# Altium PCB FCM_Integrated.PcbDoc (part 2 of 2)
Units mil, origin at the board's own origin, x right, y up, seen from the top; angles counter-clockwise.
Board outline 5855 x 4354 mil, 4 copper layers (Top Layer, Power, Ground, Bottom Layer), stack 23.756 mil thick; 164 components, 92 nets, 624 pads, 88 vias.
Unrouted connection lines stored in the file: 103.
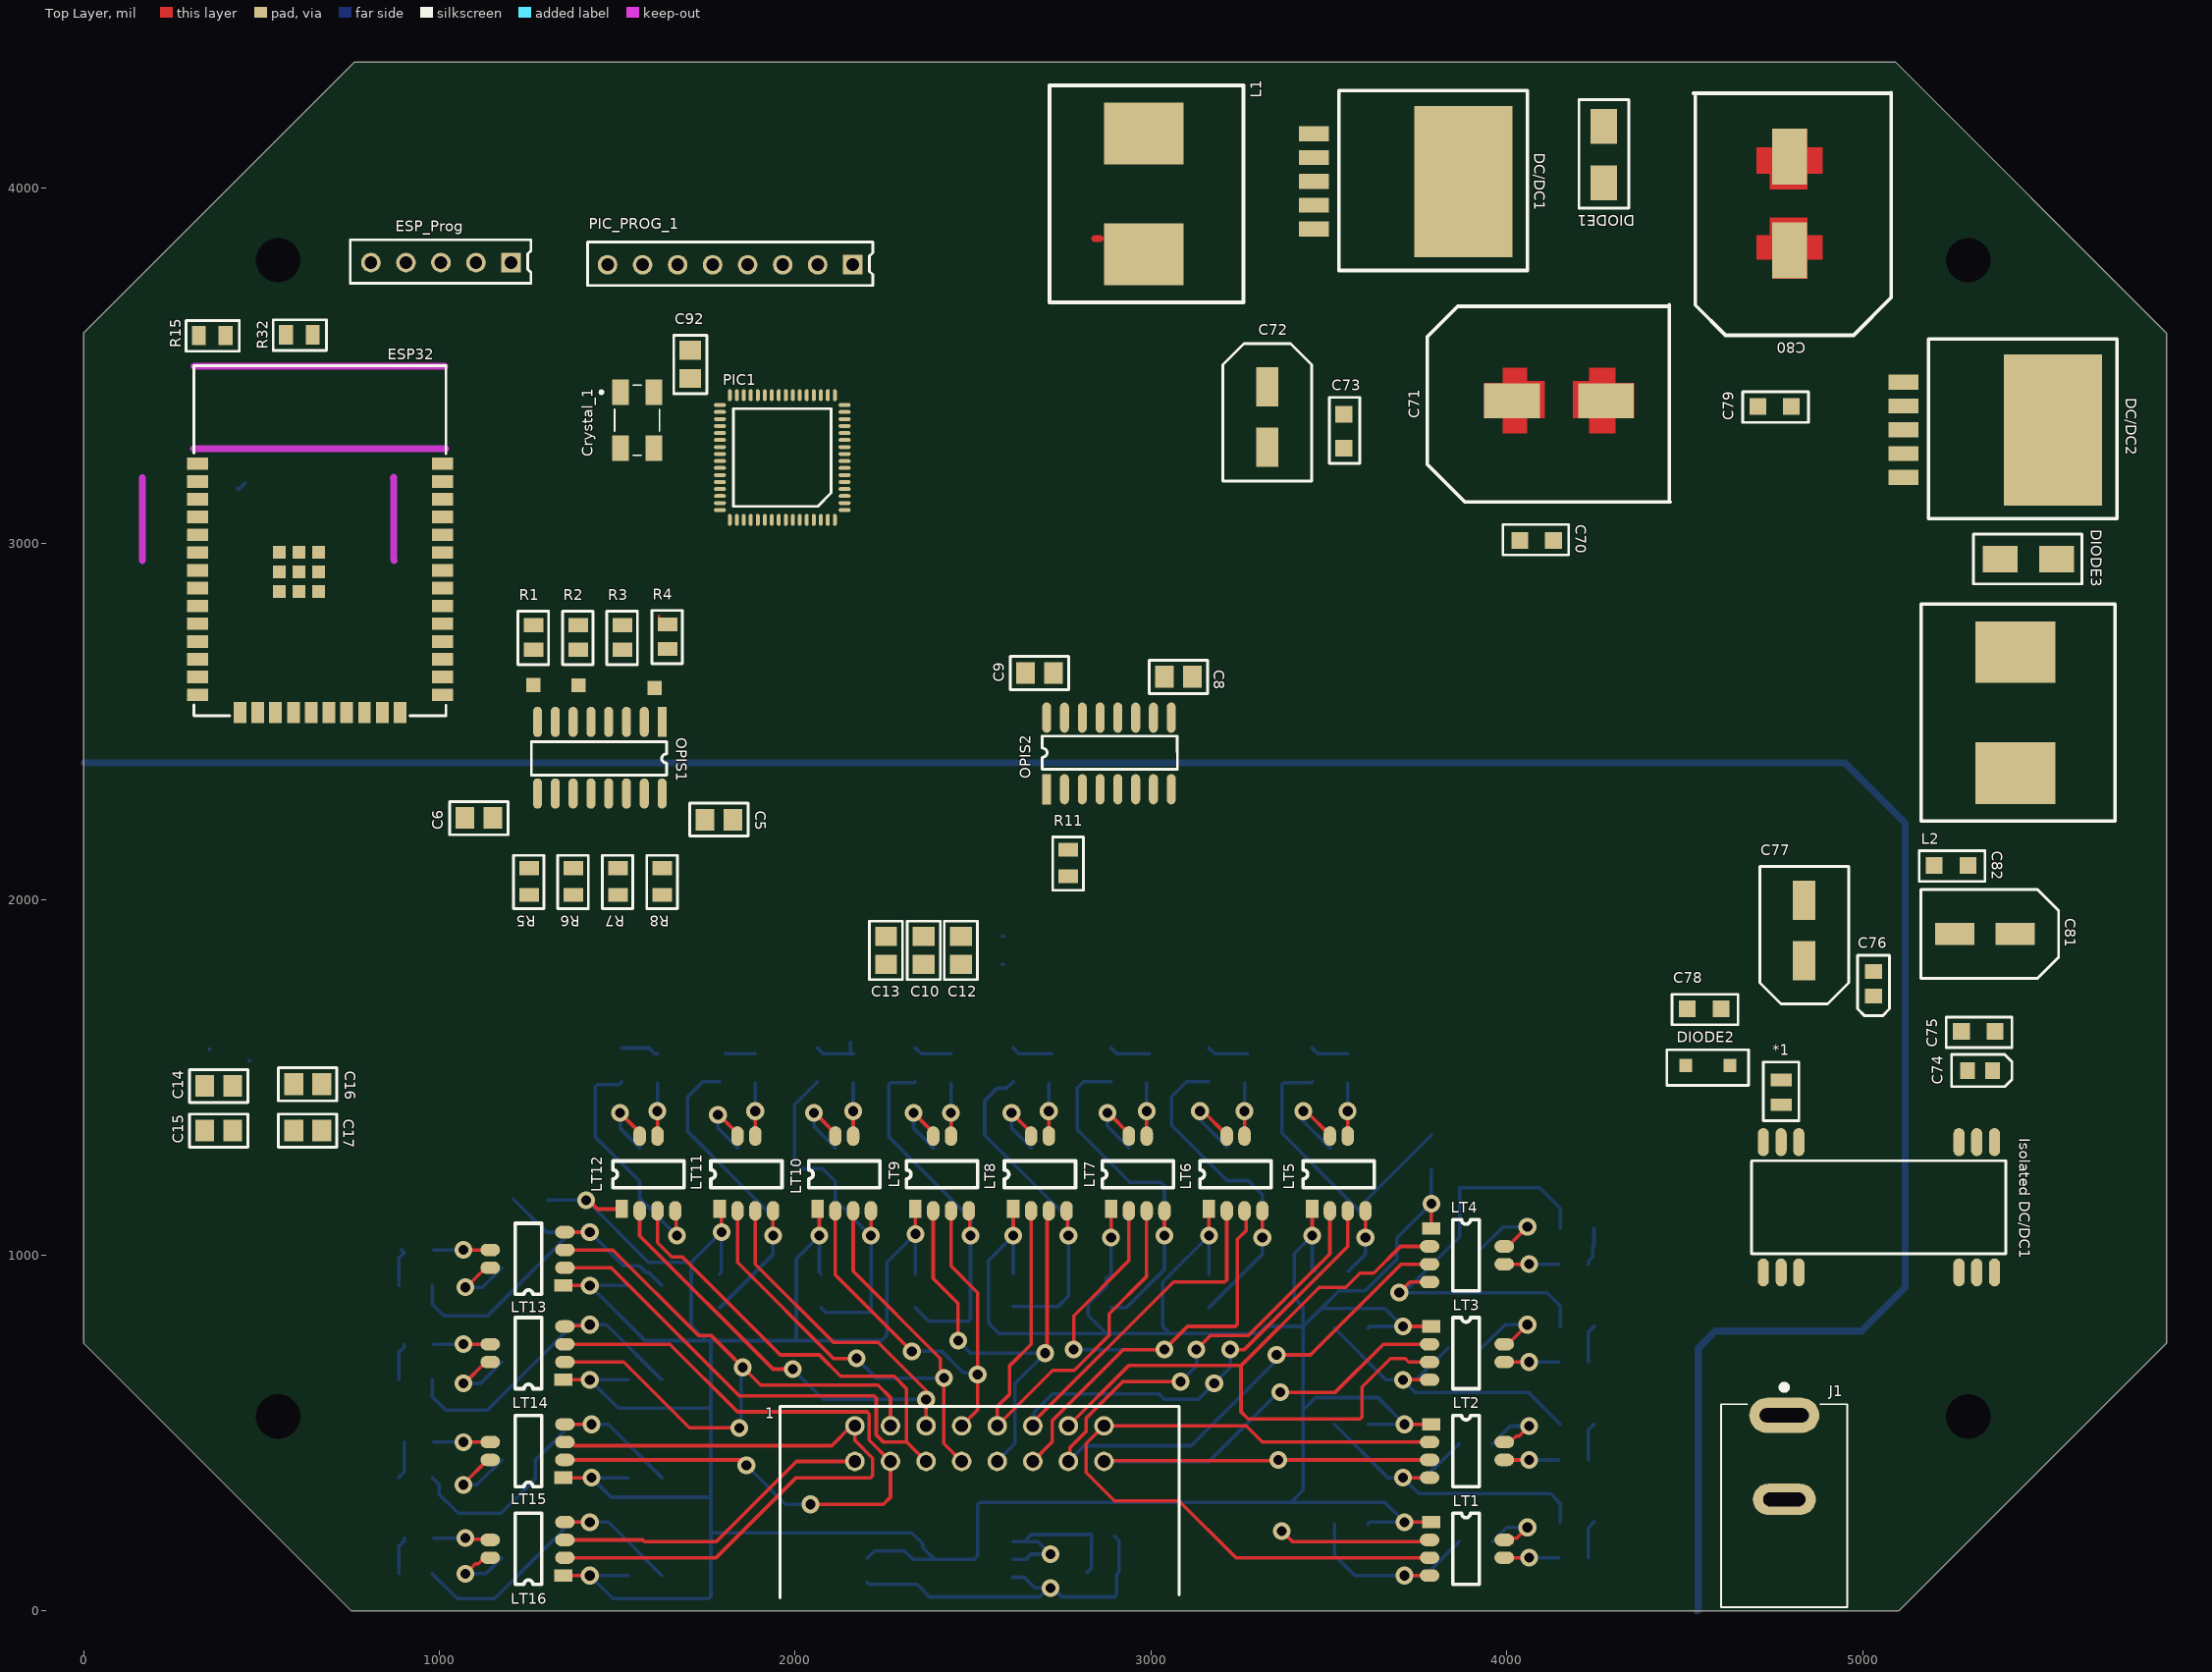
[diagram p0: Top Layer view]

## Part data (continued)
U1: "Precision Micropower, Low Dropout Voltage Reference, 2.048 V Output, 2.3 to 15 V Supply, Industrial, 8-pin SOIC (R-8), Reel", Manufacturer="Analog Devices", Operating Temp Range="-40 to 85 degC", Code_JEDEC=MS-012-AA, ComponentLink1Description="Manufacturer URL", ComponentLink1URL=http://www.analog.com/en/index.html, ComponentLink2Description=Datasheet, ComponentLink2URL=http://www.analog.com/static/imported-files/data_sheets/REF19xSeries.pdf, ComponentLink3Description="Package Specification", ComponentLink3URL=http://www.analog.com/static/imported-files/packages/PKG_PDF/SOIC_Narrow%20(R)/R_8.pdf, ComponentLink4Description="URL Link1", ComponentLink4URL="Product URL:http://www.analog.com/en/special-linear-functions/voltage-references/ref191/products/product.html", DatasheetVersion="Rev. L", Mounting Technology="Surface Mount", PackageDescription="8-Pin Standard Small Outline Package, Body 4.9 x 3.9 mm, Pitch 1.27 mm", PackageReference=R-8, PackageVersion="060506-A, 06/2006", Packing=Reel, PartNumber=REF191GSZ-REEL, Ref Out TC (ppm/C)=10, Vout=2.048V
Vref_1: library part MAX6037AAUKADJ+T, "IC VREF SERIES ADJ 0.2% SOT23-5", Case/Package=SOT-23-5, Manufacturer=Maxim, Max Input Voltage=5.5V, Max Operating Temperature=125°C, Max Output Current=5mA, Max Output Voltage=5V, Max Supply Current=250uA, Min Operating Temperature=-40°C, Min Output Voltage=1.184V, Package Quantity=1, Supplier Part Number 1=MAX6037AAUKADJ+TCT-ND, Temperature Coefficient=25ppm/°C, Tolerance=0.2%, Category="Voltage References", ComponentLink1Description=https://datasheet.ciiva.com/2008/max6037-max6037c-2008462.pdf?src-supplier=Digi-Key, ComponentLink1URL=https://datasheet.ciiva.com/2008/max6037-max6037c-2008462.pdf?src-supplier=Digi-Key, ComponentLink2Description=https://datasheet.ciiva.com/2008/max6037-max6037c-2008463.pdf?src-supplier=Digi-Key, ComponentLink2URL=https://datasheet.ciiva.com/2008/max6037-max6037c-2008463.pdf?src-supplier=Digi-Key, ComponentLink3Description=https://datasheet.ciiva.com/2008/max6037-max6037c-2008461.pdf?src-supplier=Digi-Key, ComponentLink3URL=https://datasheet.ciiva.com/2008/max6037-max6037c-2008461.pdf?src-supplier=Digi-Key, Lead Free="Lead Free", Manufacturer Part Number=MAX6037AAUKADJ+T, Mount="Surface Mount", Number of Pins=5, Operating Supply Current=250uA, Output Current=5mA, Output Type=Adjustable, Output Voltage=5V, Packaging="Tape and Reel", Radiation Hardening=No, REACH SVHC=Unknown, Reference Type=Series,Adjustable, Reference Voltage=5V, RoHS=Yes, RoHS Compliant=Yes, Series=-, Supplier 1=Digi-Key, Weight=0.001058oz

## Free pads (board coordinates)
  rect 40x40 smd: 1(1264,2603) 1(1391,2602) 1(1605,2594)
  rect 40x40 smd far side: 1(1903,218) 1(3226,305)
  round 60 hole 125: 2(547,547) 3(547,3797) 3(5297,547) 3(5297,3797)

## Via types
v1: diameter 50, hole 28, Top Layer to Bottom Layer, 88 vias

## Nets (pads, with @x,y where several pads share a name; then routed paths per layer and width w, separated by ;. In a path a pad name is that pad's centre, name@x,y a point inside that pad or via, vN(x,y) a via of type N, cw(c..) or ccw(c..) an arc to the next point about the centre after c; other vN are vias at no path point)
2.048_VDC: C20.2 C21.1 C22.2 C25.2 C28.2 C31.2 C34.2 C37.2 C40.2 C43.2 C46.2 C48.2 C52.2 C54.2 C58.2 C60.2 C64.2 C66.2 LT1.1 LT2.1 LT3.1 LT4.1 LT5.1 LT6.1 LT7.1 LT8.1 LT9.1 LT10.1 LT11.1 LT12.1 LT13.1 LT14.1 LT15.1 LT16.1 pad.1@1903,218 pad.1@3226,305 U1.6 | length 13046
  Top Layer w10: LT16.1 v1(1423,100) ; LT15.1 v1(1428,375) ; LT14.1 v1(1423,650) ; LT13.1 v1(1423,915) ; v1(1413,1155) 1419.57,1155 1444.57,1130 LT12.1 ; LT11.1 1793,1125 v1(1793,1065) ; LT10.1 2068,1125 v1(2068,1055) ; v1(2338,1060) LT9.1 ; v1(2613,1055) LT8.1 ; v1(2888,1050) LT7.1 ; v1(3163,1055) LT6.1 ; v1(3453,1055) LT5.1 ; v1(3708,800) LT3.1 ; v1(3713,250) LT1.1 ; v1(3713,525) LT2.1 ; LT4.1 v1(3788,1145)
  Bottom Layer w10: C64.2 v1(1413,1155) 1588,980 1708,980 ; C66.2 v1(1423,100) 1488,35 1757.14,35 1763,40.86 1763,220 ; C60.2 v1(1428,375) 1483,320 1757.14,320 1763,325.86 ; C54.2 v1(1423,650) 1503,570 1757.14,570 1763,575.86 ; C48.2 v1(1423,915) 1578,760 1749.72,760 ; C58.2 1793,952.24 v1(1793,1065) 1708,980 ; C52.2 2068,952.24 v1(2068,1055) 2003,990 2003,760 ; C21.1 2203.98,150 2223.22,169.24 C20.2 2332.24,145 U1.6@2392.02,145 ; C46.2 v1(2338,1060) 2258,980 2258,775 2243,760 2003,760 ; C43.2 v1(2613,1055) 2543,985 2543,810 2573,780 2874.27,780 ; v1(2888,1050) C40.2 2874.98,934.23 2874.98,914.48 2823,862.5 2823,831.27 2874.27,780 ; C37.2 v1(3163,1055) 3033,925 3033,800 3053,780 ; C34.2 3453,962.76 v1(3453,1055) 3403,1005 3403,880 3428,855 3428,800 ; C22.2 3615.24,250 v1(3713,250) 3658,305 3393,305 ; C25.2 v1(3713,525) 3638,600 3463,600 3428,565 ; C28.2 3615.24,800 v1(3708,800) 3658,850 3478,850 ; C31.2 v1(3788,1145) 3691.24,1048.24 3691.24,989.1 3602.14,900 3528,900 3478,850 ; 1708,980 1708,801.72 1749.72,760 ; 1749.72,760 1768,760 ; 1763,220 2328,220 2358.7,189.3 2358.7,178.31 U1.6@2392.02,145 ; 1763,220 1763,325.86 ; 1763,325.86 1763,575.86 ; 1763,575.86 1763,755 1768,760 ; 1768,760 2003,760 ; U1.6@2392.02,145 U1.6 2503,145 2513,155 2513,299.14 2518.86,305 3393,305 ; 2874.27,780 3053,780 ; 3053,780 3303,780 3323,800 3428,800 ; 3393,305 3428,340 3428,565 ; 3428,565 3428,800 ; 3428,800 3478,850
5VDC: "Isolated DC/DC1.1" C74.1 C75.2 C81.1 C82.2 DC/DC2.4 L2.2
+3V3: C7.1 C8.2 C9.2 C72.1 C73.2 C83.1 C85.1 C89.2 C90.2 C91.1 C92.2 DC/DC1.4 ESP32.2 L1.2 OPIS1.1 OPIS1.3 OPIS1.5 OPIS1.7 OPIS2.10 OPIS2.15 PIC1.10 PIC1.19 PIC1.26 PIC1.35 PIC1.38 PIC1.57 PIC_PROG_1.2 R9.2 R13.2 | length 14.1
  Top Layer w20: 2842.2,3857.49 2856.35,3857.49
+5: *1.1 ADC1.10 ADC1.12 ADC1.20 ADC2.10 ADC2.12 ADC2.20 C1.1 C2.1 C3.2 C4.2 C5.2 C6.2 C10.1 C12.2 C13.2 C14.1 C15.1 C16.2 C17.2 C18.1 C19.1 C23.2 C26.2 C29.2 C32.2 C35.2 C38.2 C41.2 C44.2 C47.2 C49.2 C53.2 C55.2 C59.2 C61.2 C65.2 C67.2 C76.1 C77.1 C78.2 DIODE2.K LT1.7 LT2.7 LT3.7 LT4.7 LT5.7 LT6.7 LT7.7 LT8.7 LT9.7 LT10.7 LT11.7 LT12.7 LT13.7 LT14.7 LT15.7 LT16.7 OPIS1.10 OPIS1.15 OPIS2.1 R5.1 R6.1 R7.1 R8.1 U1.2 U1.3 Vref_1.3 Vref_1.4 | length 4124.8
  Top Layer w10: C14.1 C14.1@424.37,1481 ; v1(1068,355) 1068,357.53 1135.47,425 LT15.7 ; v1(1068,640) 1070.47,640 1130.47,700 LT14.7 ; v1(1073,105) 1101.28,133.28 1109.46,133.28 1126.18,150 LT16.7 ; v1(1073,910) 1075.47,910 1130.47,965 LT13.7 ; v1(1508,1400) 1563,1345.03 LT12.7 ; v1(1783,1395) 1785.53,1395 1838,1342.53 LT11.7 ; v1(2053,1400) 2055.53,1400 2113,1342.53 LT10.7 ; C13.2 C13.2@2266,1906.37 ; v1(2333,1400) 2388,1345.03 LT9.7 ; v1(2608,1400) 2663,1345.03 LT8.7 ; OPIS2.1@2699.4,2272.3 2707,2279.9 OPIS2.1 ; v1(2878,1400) 2880.53,1400 2938,1342.53 LT7.7 ; v1(3138,1405) 3146.29,1405 3213,1338.29 LT6.7 ; v1(3428,1405) 3436.29,1405 3503,1338.29 LT5.7 ; LT1.7 3997.78,204.78 4027.78,204.78 v1(4058,235) ; LT2.7 4009.82,475 4026.54,491.72 4034.72,491.72 v1(4063,520) ; LT3.7 4003.03,750 v1(4058,805) ; LT4.7 4003.03,1025 v1(4058,1080)
  Bottom Layer w10: 465,1546 466.1,1547.1 ; v1(1068,355) 1105.76,355 C61.2 ; v1(1068,640) 1115.76,640 C55.2 ; v1(1073,105) 1130.76,105 C67.2 ; v1(1073,910) 1120.76,910 C49.2 ; v1(1508,1400) 1508,1357.24 C65.2 ; v1(1783,1395) 1783,1357.24 C59.2 ; v1(2053,1400) 2053,1362.24 C53.2 ; v1(2333,1400) 2333,1357.24 C47.2 ; v1(2608,1400) 2608,1357.24 C44.2 ; U1.3 2647.67,145 2662.67,160 v1(2718,160) 2683,195 U1.2@2643.98,195 ; U1.2 U1.2@2643.98,195 ; C19.1@2820.76,109.03 2833,121.27 2833,215 2663.98,215 U1.2@2643.98,195 ; v1(2878,1400) 2878,1362.24 C41.2 ; v1(3138,1405) 3138,1380 C38.2 ; v1(3428,1405) 3428,1377.24 C35.2 ; C29.2 3995.24,805 v1(4058,805) ; C32.2 3990.24,1080 v1(4058,1080) ; C23.2 4000.24,235 v1(4058,235) ; C26.2 4010.24,520 v1(4063,520)
+12: C70.2 C71.1 C79.2 C80.1 DC/DC1.2 DC/DC2.2 J1.1
CathH1: OPIS1.2 pad.1@1605,2594 R4.1
CathH2: OPIS1.4 R3.1
CathH3: OPIS1.6 pad.1@1391,2602 R2.1
CathH4: OPIS1.8 pad.1@1264,2603 R1.1
CathL1: OPIS2.2 R11.2
Cell_1_Voltage: ADC1.1 C24.2 R16.2 | length 106.6
  Bottom Layer w10: R16.2 4229.34,157.87 4229.34,234.09 C24.2
Cell_2_Voltage: ADC1.2 C27.2 R17.2 | length 106.6
  Bottom Layer w10: R17.2 4229.34,432.87 4229.34,509.09 C27.2
Cell_3_Voltage: ADC1.3 C30.2 R18.2 | length 106.6
  Bottom Layer w10: R18.2 4229.34,707.87 4229.34,784.09 C30.2
Cell_4_Voltage: ADC1.4 C33.2 R19.2 | length 106.6
  Bottom Layer w10: R19.2 4229.34,982.87 4242.05,995.59 4242.05,1024.39 4245.24,1027.58 C33.2
Cell_5_Voltage: ADC1.5 C36.2 R20.2 | length 106.6
  Bottom Layer w10: C36.2 3468.91,1566.34 R20.2
Cell_6_Voltage: ADC1.6 C39.2 R21.2 | length 114.5
  Bottom Layer w10: C39.2 3178.91,1566.34 R21.2 R21.2@3270.87,1566.34
Cell_7_Voltage: ADC1.7 C42.2 R22.2 | length 114.5
  Bottom Layer w10: C42.2 2903.91,1566.34 R22.2 R22.2@2995.87,1566.34
Cell_8_Voltage: ADC1.8 C45.2 R23.2 | length 114.5
  Bottom Layer w10: C45.2 2628.91,1566.34 R23.2 R23.2@2720.87,1566.34
Cell_9_Voltage: ADC2.1 C50.2 R24.2 | length 106.6
  Bottom Layer w10: C50.2 2353.91,1566.34 2430.13,1566.34 R24.2
Cell_10_Voltage: ADC2.2 C56.2 R26.2 | length 138.1
  Bottom Layer w10: C56.2 2078.91,1566.34 R26.2@2155.13,1566.34 ; 2155.13,1597.87 R26.2@2155.13,1566.34 ; R26.2 R26.2@2155.13,1566.34
Cell_11_Voltage: ADC2.3 C62.2 R28.2 | length 84.1
  Bottom Layer w10: C62.2@1803.91,1566.34 R28.2
Cell_12_Voltage: ADC2.4 C68.2 R30.2 | length 106.6
  Bottom Layer w10: C68.2 1589.22,1582.24 1605.13,1566.34 R30.2
Cell_13_Voltage: ADC2.5 C51.2 R25.2 | length 109.8
  Bottom Layer w10: C51.2 885.76,991.22 901.66,1007.13 R25.2@893.79,1015
Cell_14_Voltage: ADC2.6 C57.2 R27.2 | length 106.6
  Bottom Layer w10: C57.2 885.76,726.22 901.66,742.13 R27.2
Cell_15_Voltage: ADC2.7 C63.2 R29.2 | length 106.6
  Bottom Layer w10: C63.2 901.66,390.91 R29.2
Cell_16_Voltage: ADC2.8 C69.2 R31.2 | length 106.6
  Bottom Layer w10: C69.2 885.76,181.22 901.66,197.13 R31.2
Chipsel1_HS: ADC1.18 OPIS1.12 R6.2
Chipsel1_LS: PIC1.43 R2.2
Chipsel2_HS: ADC2.18 OPIS1.14 R8.2
Chipsel2_LS: PIC1.31 R4.2 | length 7.9
  Top Layer w8: R4.2@1617.44,2788.58 1617.44,2796.46
D_CLK_LS: PIC1.50 R1.2
D_In_HS: ADC1.17 ADC2.17 OPIS1.13 R7.2
D_in_LS: PIC1.32 R3.2
D_out_HS: ADC1.15 ADC2.15 R11.1
D_out_L: OPIS2.14 PIC1.58 R9.1
DCLK_HS: ADC1.19 ADC2.19 OPIS1.11 R5.2
ESP_Boot_D: ESP32.25 R32.1
ESP_Boot_P: ESP_Prog.4 R32.2
ESP_Enable_D: ESP32.3 R15.2
ESP_Enable_P: ESP_Prog.5 R15.1
ESP_TX_BOOT: ESP32.35 ESP_Prog.2
ESPout-PICin: PIC1.44 R10.2
GND: 
GND_H: "Isolated DC/DC1.4" ADC1.9 ADC1.13 ADC1.14 ADC2.9 ADC2.13 ADC2.14 C1.2 C2.2 C3.1 C4.1 C5.1 C6.1 C10.2 C11.1 C12.1 C13.1 C14.2 C15.2 C16.1 C17.1 C18.2 C19.2 C20.1 C21.2 C22.1 C23.1 C24.1 C25.1 C26.1 C27.1 C28.1 C29.1 C30.1 C31.1 C32.1 C33.1 C34.1 C35.1 C36.1 C37.1 C38.1 C39.1 C40.1 C41.1 C42.1 C43.1 C44.1 C45.1 C46.1 C47.1 C48.1 C49.1 C50.1 C51.1 C52.1 C53.1 C54.1 C55.1 C56.1 C57.1 C58.1 C59.1 C60.1 C61.1 C62.1 C63.1 C64.1 C65.1 C66.1 C67.1 C68.1 C69.1 C76.2 C77.2 C78.1 C93.1 C94.1 DIODE2.A LT1.2 LT1.4 LT2.4 LT3.4 LT4.4 LT5.4 LT6.4 LT7.4 LT8.4 LT9.4 LT10.4 LT11.4 LT12.4 LT13.4 LT14.4 LT15.4 LT16.4 OPIS1.9 OPIS1.16 U1.4 Vref_1.2 | length 17192.2
  Top Layer w10: LT16.4 v1(1423,250) ; LT15.4 v1(1428,525) ; LT14.4 1355.5,802.5 1420.5,802.5 v1(1423,805) ; LT13.4 v1(1423,1065) ; LT12.4 1665.5,1122.5 1665.5,1057.5 v1(1668,1055) ; v1(1938,1055) LT11.4 ; v1(2213,1055) LT10.4 ; LT9.4 2490.5,1122.5 2490.5,1057.5 v1(2493,1055) ; LT8.4 2765.5,1122.5 2765.5,1057.5 v1(2768,1055) ; v1(3038,1055) LT7.4 ; v1(3313,1050) LT6.4 ; v1(3368,225) 3397.78,195.22 3778.22,195.22 LT1.2 ; v1(3603,1050) LT5.4 ; v1(3698,895) 3728,925 LT4.4 ; v1(3708,375) LT2.4 ; v1(3708,650) LT3.4 ; v1(3713,100) LT1.4
  Bottom Layer w10: C69.1 1050.24,35 1155.24,35 C67.1 1370.24,250 v1(1423,250) 1475.24,250 C66.1 ; C63.1 998.87,356.38 998.87,329.13 1053,275 1173,275 1270.24,372.24 C61.1 1370.24,525 v1(1428,525) 1475.24,525 C60.1 ; C57.1 980.24,602.76 1018,565 1135.24,565 C55.1 1375.24,805 v1(1423,805) 1470.24,805 C54.1 ; C51.1 980.24,862.76 1013,830 1135.24,830 C49.1 1370.24,1065 ; C64.1@1208,1157.76 C64.1 1300.76,1065 1370.24,1065 ; C68.1 1505.24,1480 1443.86,1480 1438,1474.14 1438,1332.76 C65.1 1563,1160 v1(1668,1055) ; C48.1 1588.43,951.81 1581.19,951.81 1563,970 1518,970 v1(1423,1065) 1370.24,1065 ; C58.1 1938,1002.76 v1(1938,1055) 1938,1107.76 C59.1 1698,1347.76 1698,1445 1740.76,1487.76 C62.1 ; C56.1 1998,1422.76 1998,1260.86 2015.24,1243.62 2077.14,1243.62 C53.1 2113,1155 v1(2213,1055) 2213,845 2213.86,844.14 2208.86,839.14 2086.61,839.14 C52.1 ; C21.2 2208.25,74.75 C20.1 2343.25,74.75 2378,40 2686.43,40 v1@2711.43,65 ; C46.1 2375.76,815 2487.14,815 2493,820.86 v1(2493,1055) 2493,1102.76 C47.1 2263,1332.76 2263,1479.14 2268.86,1485 2335.24,1485 C50.1 ; C11.1@2582.06,1817.63 C11.1 ; U1.4 2643.98,95 2673.98,65 v1@2711.43,65 ; C43.1 2738.51,855.51 2768,885 v1(2768,1055) 2768,1102.76 C44.1 2533,1337.76 2533,1435 2567.13,1469.13 2594.38,1469.13 C45.1 ; C40.1 2930.76,852.76 3038,960 v1(3038,1055) 3038,1195 3028,1205 2940.76,1205 C41.1 2793,1352.76 2793,1470 2810.76,1487.76 C42.1 ; C18.2 2910.24,197.76 C19.2 2903,102.76 2903,45.86 2897.14,40 2749.57,40 2724.57,65 v1(2718,65) v1@2711.43,65 ; C37.1 3313,1002.76 v1(3313,1050) 3313,1170 3273,1210 3213.51,1210 C38.1 3058,1365.51 3058,1445 3100.76,1487.76 C39.1 ; C36.1 3450.24,1485 3373.86,1485 3368,1479.14 3368,1342.76 C35.1 3603,1107.76 ; C22.1 3515.76,157.24 3573,100 v1(3713,100) 3770.76,100 C23.1 ; C25.1 3665.76,375 v1(3708,375) ; C28.1 3660.76,650 v1(3708,650) ; C34.1 3603,1002.76 v1(3603,1050) 3603,1107.76 ; C31.1 3603,1152.24 3603,1107.76 ; C29.1 3748,652.24 3710.24,652.24 v1(3708,650) ; C26.1 3770.76,375 v1(3708,375) ; C24.1 4150.76,302.24 4123,330 3753,330 v1(3708,375) ; C27.1 4063,612.76 4063,614.14 3743.86,614.14 v1(3708,650) ; C30.1 4150.76,857.24 4113,895 v1(3698,895) 3705.65,902.65 3718.41,902.65 3868,1052.24 3868,1190 4093,1190 4150.76,1132.24 C33.1
GND_L: "Isolated DC/DC1.2" "Isolated DC/DC1.3" C7.2 C8.1 C9.1 C70.1 C71.2 C72.2 C73.1 C74.2 C75.1 C79.1 C80.2 C81.2 C82.1 C83.2 C84.2 C85.2 C86.2 C87.1 C88.2 C89.1 C90.1 C91.2 C92.1 Crystal_1.2 Crystal_1.4 DC/DC1.3 DC/DC1.5 DC/DC1.6 DC/DC2.3 DC/DC2.5 DC/DC2.6 DIODE1.A DIODE3.A ESP32.1 ESP32.15 ESP32.38 ESP32.39 ESP_Prog.3 J1.2 OPIS2.9 OPIS2.16 PIC1.9 PIC1.20 PIC1.25 PIC1.41 PIC_PROG_1.3 | length 27.9
  Bottom Layer w10: C83.2@433,3156 C83.2 437.95,3154 C83.2@453.62,3169.67
MCLR: PIC1.7 PIC_PROG_1.1 R14.2
Net1_1: 1.1 LT1.3 LT2.2 | length 2149.7
  Top Layer w10: LT1.3 3238.67,150 3078.67,310 2898,310 2818,390 2818,470.67 1.1 3267.33,520.67 3313,475 LT2.2
Net1_2: 1.2 LT2.3 LT3.2 | length 1983.5
  Top Layer w10: 1.2 2870.17,422.84 3355.84,422.84 v1(3358,425) LT2.3 ; v1(3363,615) 3518,615 3653,750 LT3.2
  Bottom Layer w10: 1.2@2870.17,422.84 1.2 3163.67,420.67 v1@3368,625 ; v1@3355.84,422.84 v1(3358,425)
Net1_3: 1.3 LT3.3 LT4.2 | length 2016
  Top Layer w10: 1.3 2937.33,690 3253,690 ; LT3.3 3724.59,700 3714.59,710 3673,710 3593,630 3593,545.86 3587.14,540 3273,540 3253,560 3253,690 ; LT4.2 3701.65,1025 3626.65,950 3588,950 3548,910 3473,910 3253,690
Net1_4: 1.4 LT4.3 LT5.2 | length 2429.8
  Top Layer w10: 1.4 2772.29,424.96 2772.29,459.29 2818,505 2818,542.39 2920.61,645 v1(3083,645) ; v1(3128,735) 3168,775 3274.72,775 3503,1003.28 LT5.2 ; v1(3353,720) 3448,720 3703,975 LT4.3
  Bottom Layer w10: 1.4 2812.33,465 3113,465 3353,705 v1(3353,720) v1@3353,730 ; v1(3083,645) 3128,690 v1(3128,735)
Net1_5: 1.5 LT5.3 LT6.2 | length 2170.2
  Top Layer w10: 1.5 2668,530 3063,925 3207.14,925 3213,930.86 LT6.2 ; v1(3223,735) 3263,735 3553,1025 LT5.3
  Bottom Layer w10: 1.5 2672.29,524.96 2672.29,559.29 2723,610 3023,610 3038,595 3133,595 v1(3178,640) 3223,685 v1(3223,735)
Net1_6: 1.6 LT6.3 LT7.2 | length 1810.1
  Top Layer w10: 1.6 2723,475.67 2723,535 2923,735 v1(3038,735) 3103,800 3237.14,800 3243,805.86 3243,1045 3268,1070 3268,1083.18 3267.78,1083.39 3267.78,1120.22 LT6.3 ; v1(2783,735) 2783,830 2938,985 LT7.2
  Bottom Layer w10: v1(2783,735) v1(3038,735)
Net1_7: 1.7 LT7.3 LT8.2 | length 1457.5
  Top Layer w10: LT8.2 2663,750 2603,690 2603,610 2568,575 1.7 2723.71,676.38 2784.38,676.38 2883,775 2883,835.67 2988,940.67 LT7.3
Net1_8: 1.8 LT8.3 LT9.2 | length 1417.9
  Top Layer w10: LT9.2 2388,935 2458,865 v1(2458,760) ; v1(2703,725) 2708.22,730.22 2708.22,1120.22 LT8.3
  Bottom Layer w10: v1(2458,760) 2493,725 v1(2703,725) 2618,640 2618,470.67 1.8
Net1_9: 1.9 LT9.3 LT10.2 | length 1350
  Top Layer w10: LT10.2 2113,945 v1(2328,730) ; LT9.3 2438,970 2513,895 v1(2513,665) 2513,565.67 1.9
  Bottom Layer w10: v1(2328,730) 2413,730 2473,670 2508,670 v1(2513,665)
Net1_10: 1.10 LT10.3 LT11.2 | length 1690.3
  Top Layer w10: LT11.2 1838,980 2108,710 v1(2173,710) ; LT10.3 2163,955 2408,710 2408,680.86 2410.35,678.51 2410.35,662.65 v1(2418,655) 2418,470.67 1.10
  Bottom Layer w10: v1(2173,710) 2228,655 v1(2418,655)
Net1_11: 1.11 LT11.3 LT12.2 | length 1941.9
  Top Layer w10: LT12.2 1563,1055 1938,680 v1(1993,680) ; LT11.3 1888,975 2108,755 2233,755 2368,620 v1(2368,595) 1.11
  Bottom Layer w10: v1(1993,680) 2078,595 v1(2368,595)
Net1_12: 1.12 LT12.3 LT13.2 | length 2410.6
  Top Layer w10: LT13.2 1483,965 1843,605 2222.14,605 2228,599.14 2228,495 2247.33,475.67 2313,475.67 ; LT12.3 1613,1035 1653,995 1683,995 1958,720 2068,720 2128,660 2278,660 2313,625 2313,475.67 ; 1.12 2313,475.67
Net1_13: 1.13 LT13.3 LT14.2 | length 1907
  Top Layer w10: LT14.2 1518,700 1703,515 v1(1843,515) ; LT13.3 1488,1015 1728,775 1763,775 1903,635 2233,635 2268,600 1.13
  Bottom Layer w10: v1(1843,515) 1848,520 1848,680 v1(1853,685)
Net1_14: 1.14 LT14.3 LT15.2 | length 2170.2
  Top Layer w10: LT15.2 1848,425 v1(1863,410) ; LT14.3 1648,750 1838,560 2202.14,560 2208,554.14 2208,480.67 1.14 2268,320 2248,300 v1(2043,300)
  Bottom Layer w10: v1(1863,410) 1973,300 v1(2043,300)
Net1_15: 1.15 LT15.3 LT16.2 | length 1963.3
  Top Layer w10: LT16.2 1778,150 2003,375 2212.14,375 2218,380.86 2218,430 2168,480 1.15 2158.67,520.67 2103,465 1379.82,465 1369.82,475 LT15.3
Net1_16: 1.16 LT16.3 | length 910.5
  Top Layer w10: LT16.3 1571.41,200 1576.41,195 1778,195 2003.67,420.67 1.16
Net*1_2: "Isolated DC/DC1.5" *1.2 | length 8.6
  Top Layer w10: *1.2 *1.2@4777.06,1416.94
NetC84_1: C84.1 R13.1 R14.1
NetC86_1: C86.1 Crystal_1.3 PIC1.40
NetC87_2: C87.2 Crystal_1.1 PIC1.39 | length 6.8
  Top Layer w8: Crystal_1.1@1507.76,3405.93 Crystal_1.1@1507.76,3412.74
NetC88_1: C88.1 PIC1.56
NetDC/DC1_1: DC/DC1.1 DIODE1.K L1.1
NetDC/DC2_1: DC/DC2.1 DIODE3.K L2.1
NetESP32_23: ESP32.23 R12.1
NetESP32_24: ESP32.24 R10.1
NetESP32_34: ESP32.34 ESP_Prog.1
NetLT1_6: LT1.6 R16.1 | length 153.7
  Top Layer w10: LT1.6 v1(4063,150)
  Bottom Layer w10: v1(4063,150) R16.1
NetLT2_6: LT2.6 R17.1 | length 153.7
  Top Layer w10: LT2.6 v1(4063,425)
  Bottom Layer w10: v1(4063,425) R17.1
NetLT3_6: LT3.6 R18.1 | length 153.7
  Top Layer w10: LT3.6 v1(4063,700)
  Bottom Layer w10: v1(4063,700) R18.1
NetLT4_6: LT4.6 R19.1 | length 153.7
  Top Layer w10: LT4.6 v1(4063,975)
  Bottom Layer w10: v1(4063,975) R19.1
NetLT5_6: LT5.6 R20.1 | length 158.7
  Top Layer w10: LT5.6 v1(3553,1405)
  Bottom Layer w10: v1@3553,1395 v1(3553,1405) R20.1
NetLT6_6: LT6.6 R21.1 | length 158.7
  Top Layer w10: LT6.6 v1(3263,1405)
  Bottom Layer w10: v1@3263,1395 v1(3263,1405) R21.1
NetLT7_6: LT7.6 R22.1 | length 158.7
  Top Layer w10: LT7.6 v1(2988,1405)
  Bottom Layer w10: v1@2988,1395 v1(2988,1405) R22.1
NetLT8_6: LT8.6 R23.1 | length 158.7
  Top Layer w10: LT8.6 v1(2713,1405)
  Bottom Layer w10: v1@2713,1395 v1(2713,1405) R23.1
NetLT9_6: LT9.6 R24.1 | length 148.7
  Top Layer w10: LT9.6 v1(2438,1400)
  Bottom Layer w10: v1(2438,1400) R24.1
NetLT10_6: LT10.6 R26.1 | length 158.7
  Top Layer w10: LT10.6 v1(2163,1405)
  Bottom Layer w10: v1@2163,1395 v1(2163,1405) R26.1
NetLT11_6: LT11.6 R28.1 | length 158.7
  Top Layer w10: LT11.6 v1(1888,1405)
  Bottom Layer w10: v1@1888,1395 v1(1888,1405) R28.1
NetLT12_6: LT12.6 R30.1 | length 158.7
  Top Layer w10: LT12.6 v1(1613,1405)
  Bottom Layer w10: v1@1613,1395 v1(1613,1405) R30.1
NetLT13_6: LT13.6 R25.1 | length 158.7
  Top Layer w10: v1(1068,1015) LT13.6
  Bottom Layer w10: R25.1 v1(1068,1015)
NetLT14_6: LT14.6 R27.1 | length 168.7
  Top Layer w10: v1(1068,750) LT14.6
  Bottom Layer w10: R27.1 v1(1068,750) v1@1078,750
NetLT15_6: LT15.6 R29.1 | length 168.7
  Top Layer w10: v1(1068,475) LT15.6
  Bottom Layer w10: R29.1 v1(1068,475) v1@1078,475
NetLT16_6: LT16.6 R31.1 | length 160.7
  Top Layer w10: v1(1073,205) 1075.5,202.5 1140.5,202.5 LT16.6
  Bottom Layer w10: R31.1 v1(1073,205)
PGEC1: PIC1.15 PIC_PROG_1.5
PGED1: PIC1.16 PIC_PROG_1.4
PICout-ESPin: PIC1.45 R12.2
V_Ref: ADC1.11 ADC2.11 C11.2 C93.2 C94.2 Vref_1.5 | length 5.6
  Bottom Layer w10: C94.2 C94.2@354.54,1578.83 ; C11.2@2582.06,1896.37 C11.2
pads on no net: "Isolated DC/DC1.6" "Isolated DC/DC1.7" "Isolated DC/DC1.8" "Isolated DC/DC1.9" "Isolated DC/DC1.10" "Isolated DC/DC1.11" "Isolated DC/DC1.12" ADC1.16 ADC2.16 ESP32.4 ESP32.5 ESP32.7 ESP32.8 ESP32.9 ESP32.10 ESP32.11 ESP32.12 ESP32.13 ESP32.14 ESP32.16 ESP32.17 ESP32.18 ESP32.19 ESP32.20 ESP32.21 ESP32.22 ESP32.26 ESP32.27 ESP32.28 ESP32.29 ESP32.30 ESP32.31 ESP32.32 ESP32.33 ESP32.36 ESP32.37 OPIS2.3 OPIS2.4 OPIS2.5 OPIS2.6 OPIS2.7 OPIS2.8 OPIS2.11 OPIS2.12 OPIS2.13 PIC1.1 PIC1.2 PIC1.3 PIC1.4 PIC1.5 PIC1.6 PIC1.8 PIC1.11 PIC1.12 PIC1.13 PIC1.14 PIC1.17 PIC1.18 PIC1.21 PIC1.22 PIC1.23 PIC1.24 PIC1.27 PIC1.28 PIC1.29 PIC1.30 PIC1.33 PIC1.34 PIC1.36 PIC1.37 PIC1.42 PIC1.46 PIC1.47 PIC1.48 PIC1.49 PIC1.51 PIC1.52 PIC1.53 PIC1.54 PIC1.55 PIC1.59 PIC1.60 PIC1.61 PIC1.62 PIC1.63 PIC1.64 PIC_PROG_1.6 PIC_PROG_1.7 PIC_PROG_1.8 U1.1 U1.5 U1.7 U1.8 Vref_1.1
copper on no net: | length 7886.1
  Bottom Layer w20: 2,2384 4951,2384 5002,2333 5120,2215 5120,1740 5120,910 4997,787 4586,787 4538,739 4538,3 4535,0

## Keep-outs
Top Layer:
  lines w20: 165.18,2953 165.18,3185 ; 309,3267 1017.84,3267 ; 310.18,3499 1015.41,3499 ; 870.41,3185 872,3186.59 872,2953.84 872.84,2953